# Altium PCB PCB1.PcbDoc
Units mm, origin at the board's own origin, x right, y up, seen from the top; angles counter-clockwise.
Board outline 94 x 98 mm, 2 copper layers (Top Layer, Bottom Layer), stack 1.571 mm thick; 43 components, 34 nets, 209 pads, 286 vias.
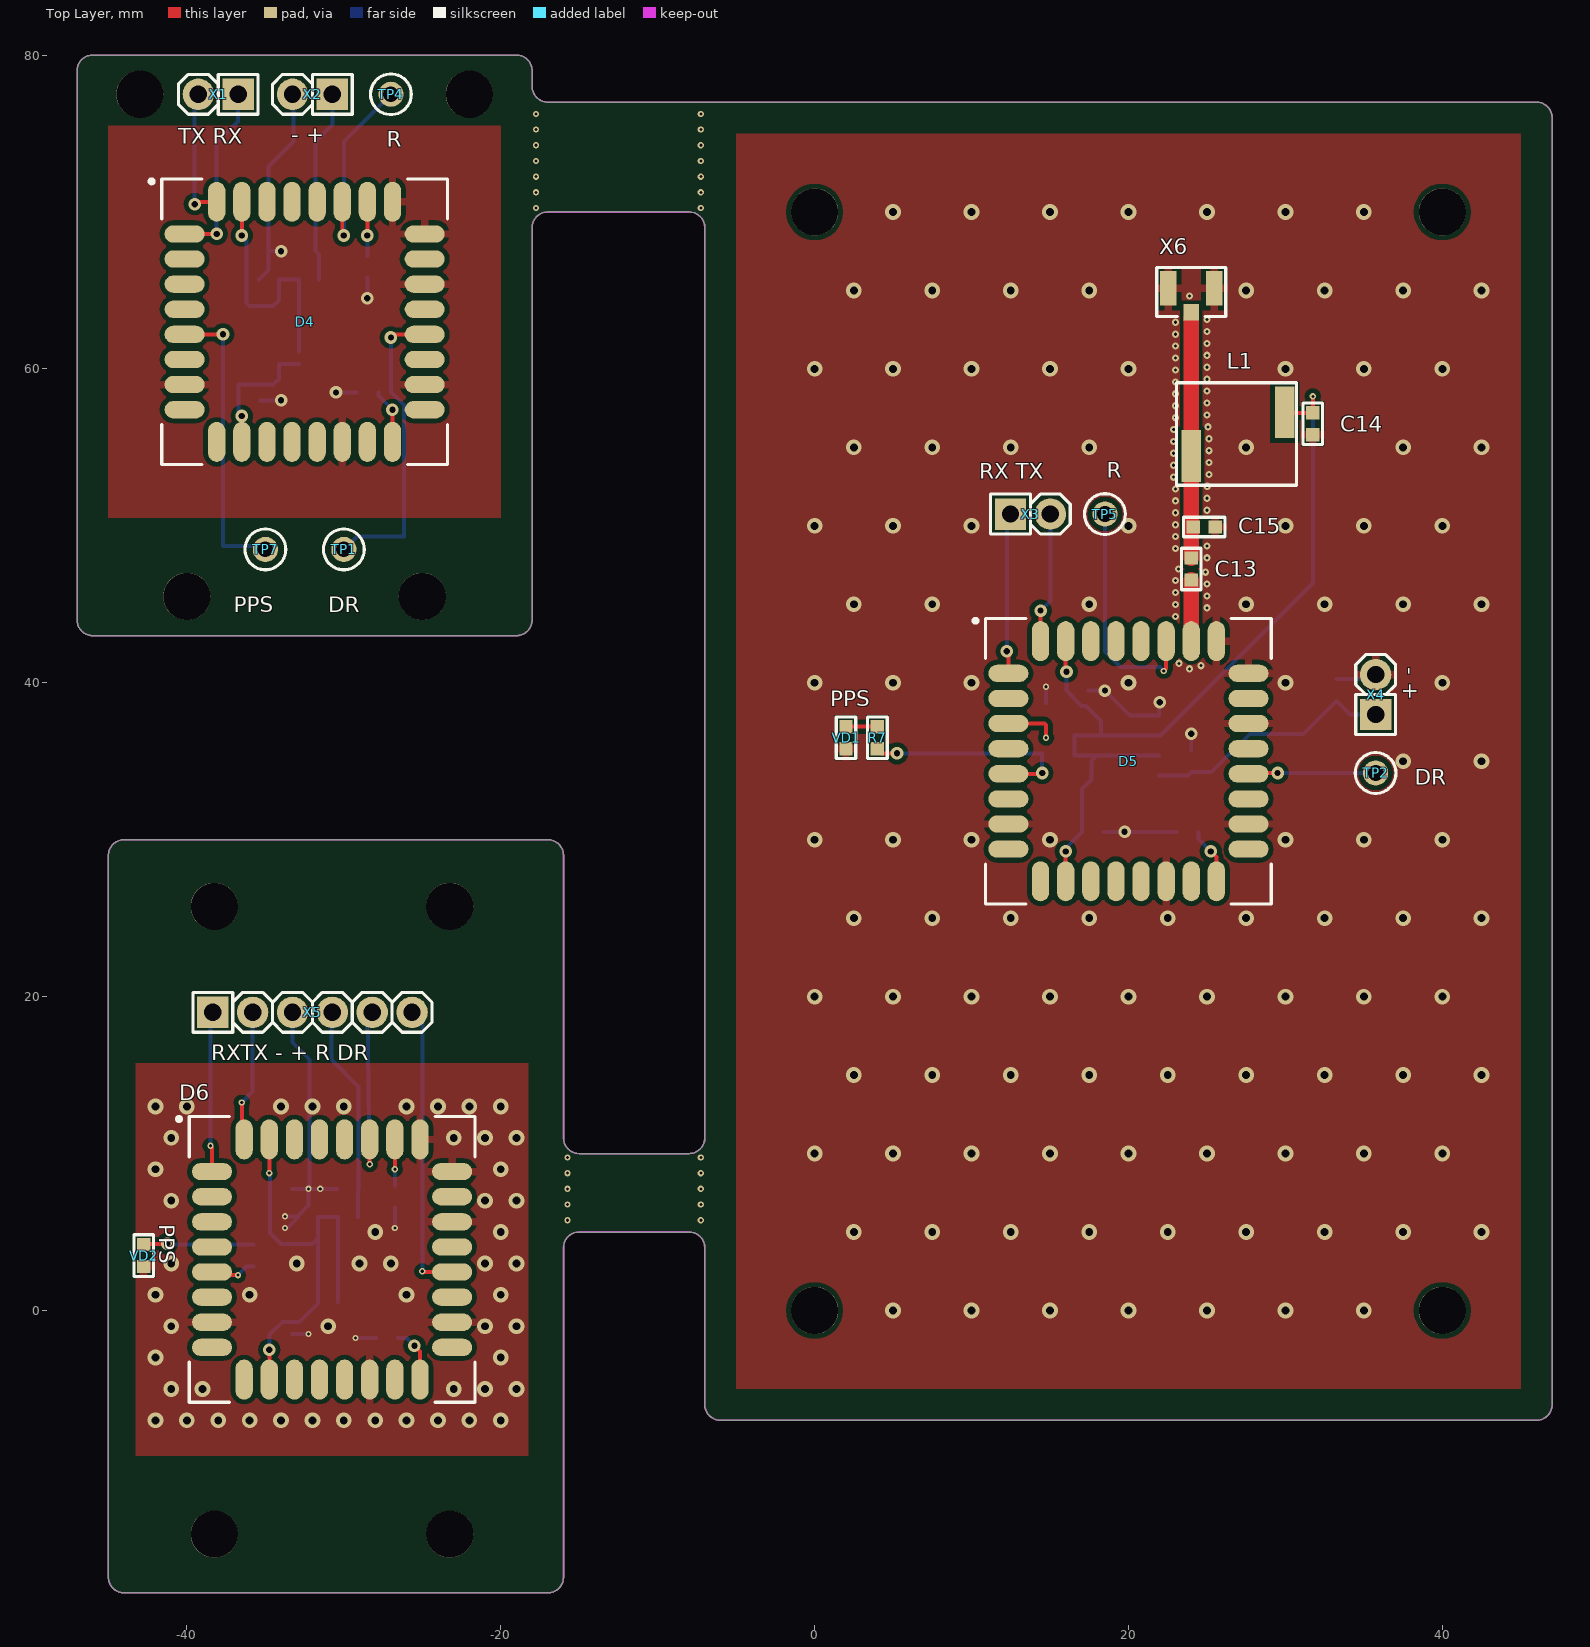
[diagram p0: Top Layer view]
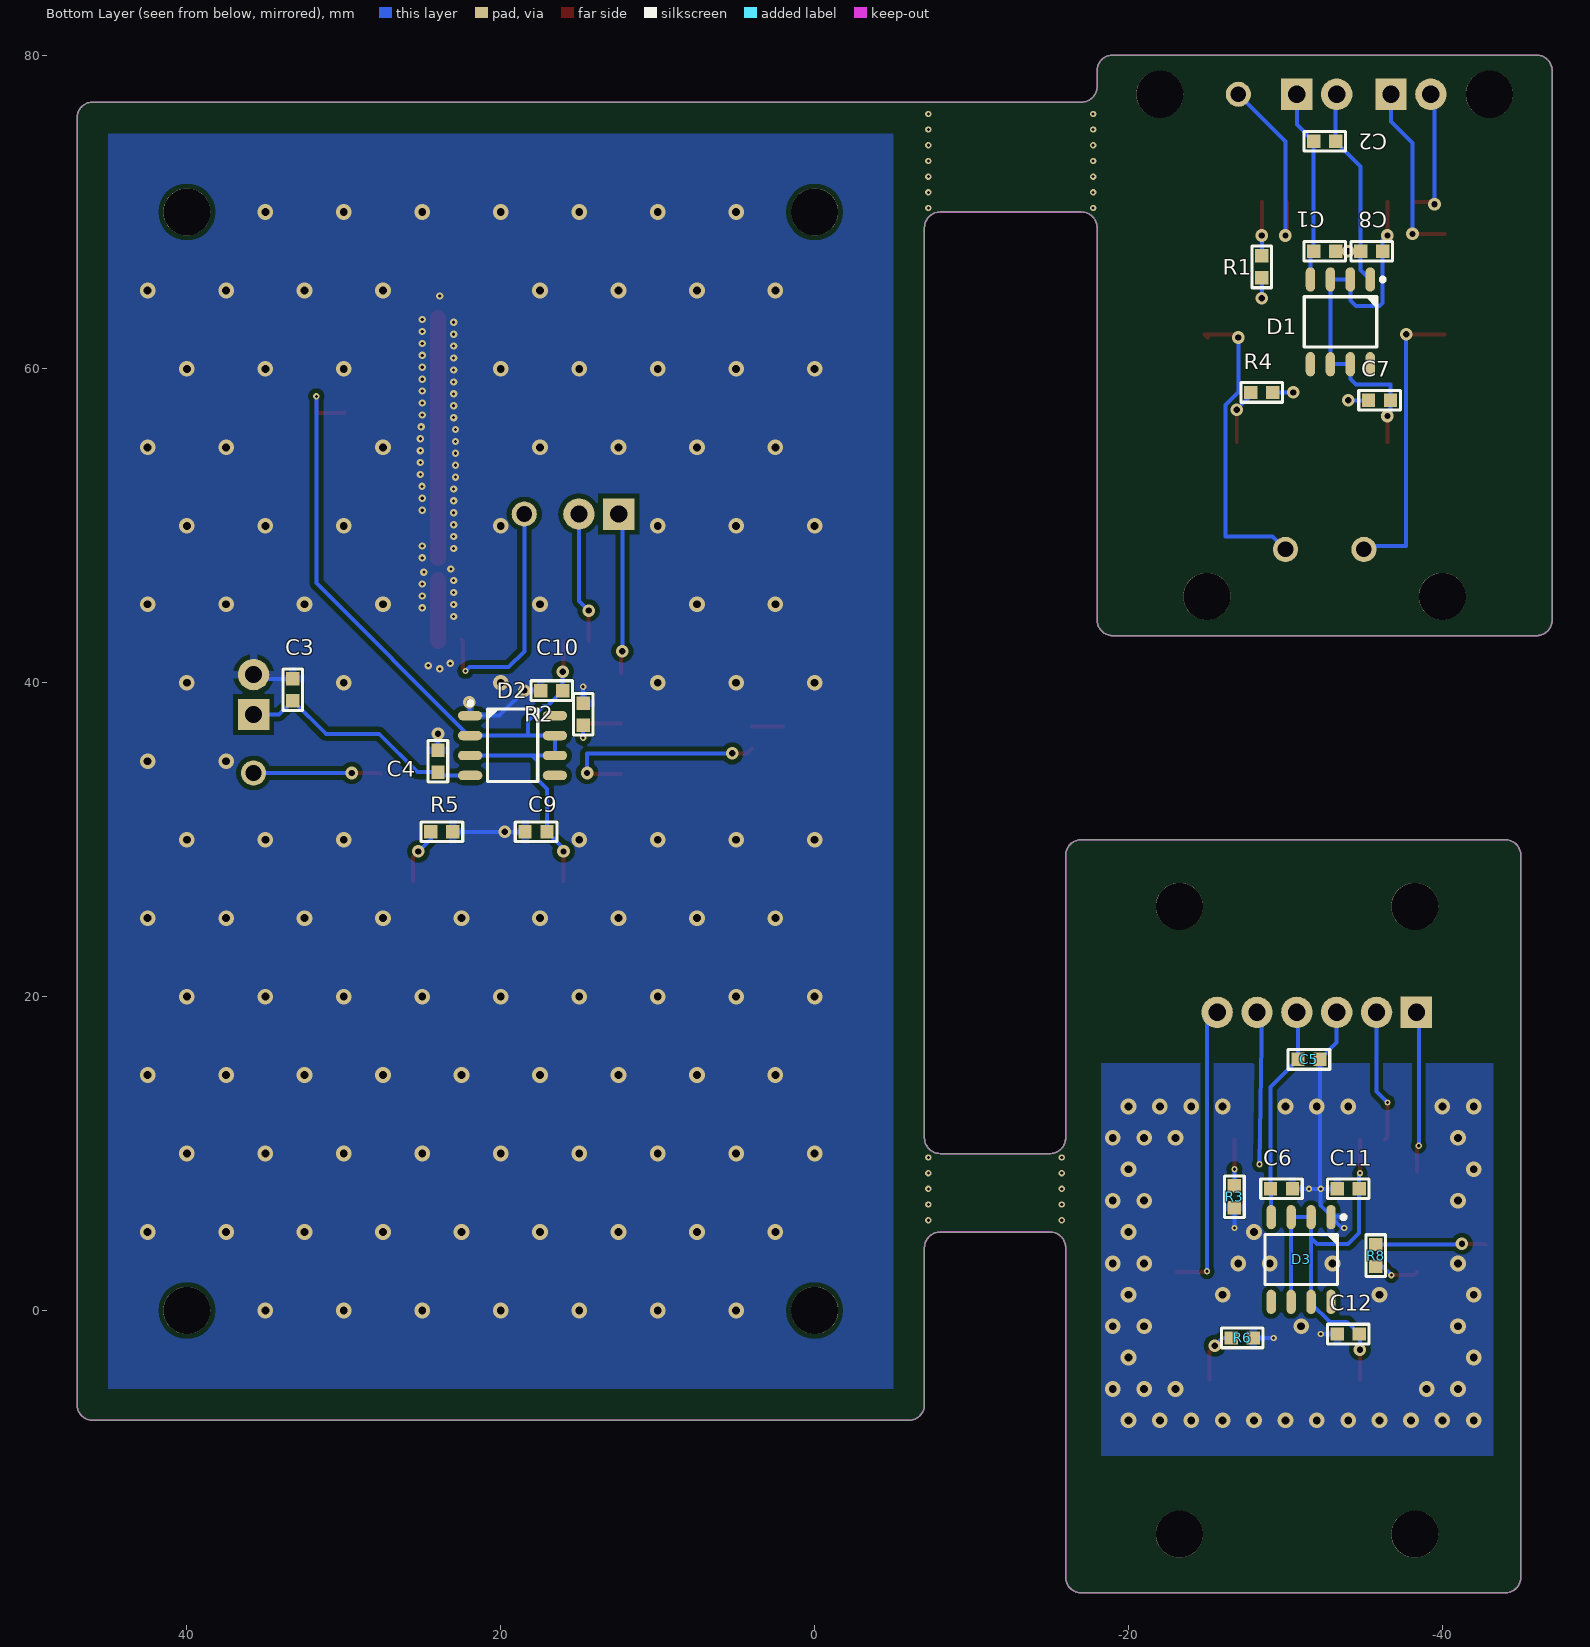
[diagram p1: Bottom Layer view, seen from below]
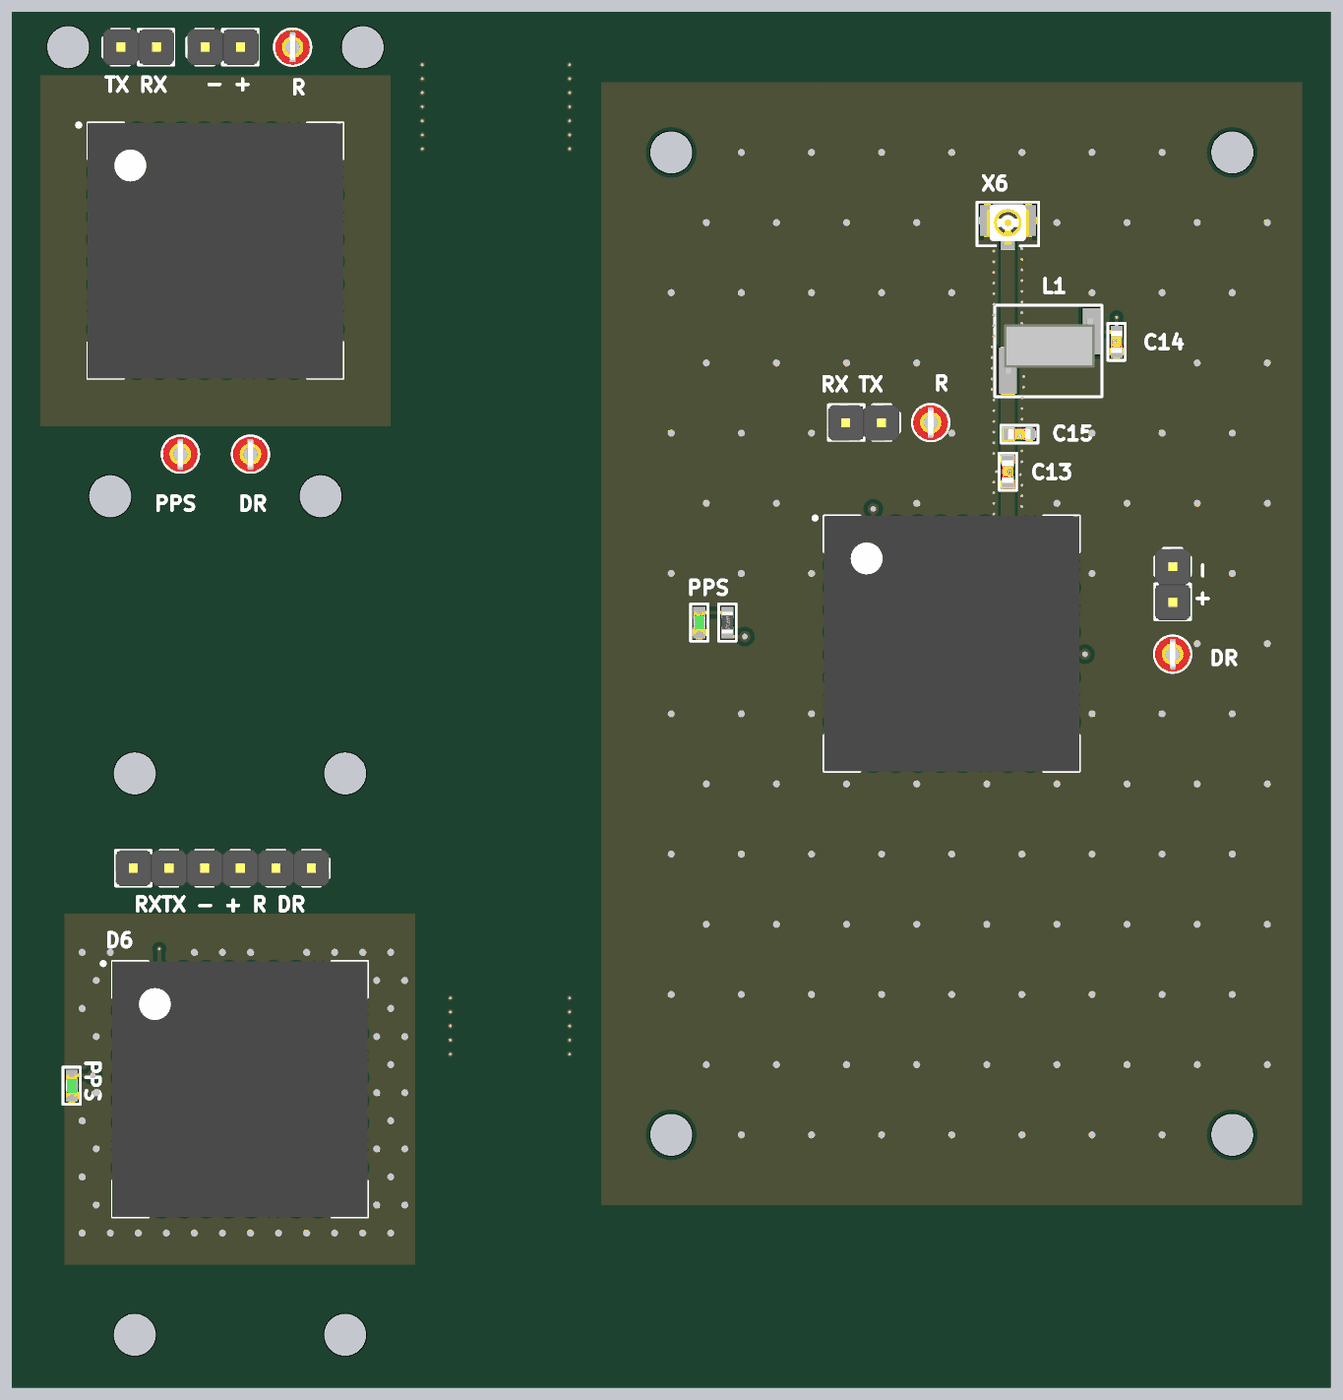
[diagram p2: 3D render of the assembled board from above, using the file's embedded part models]
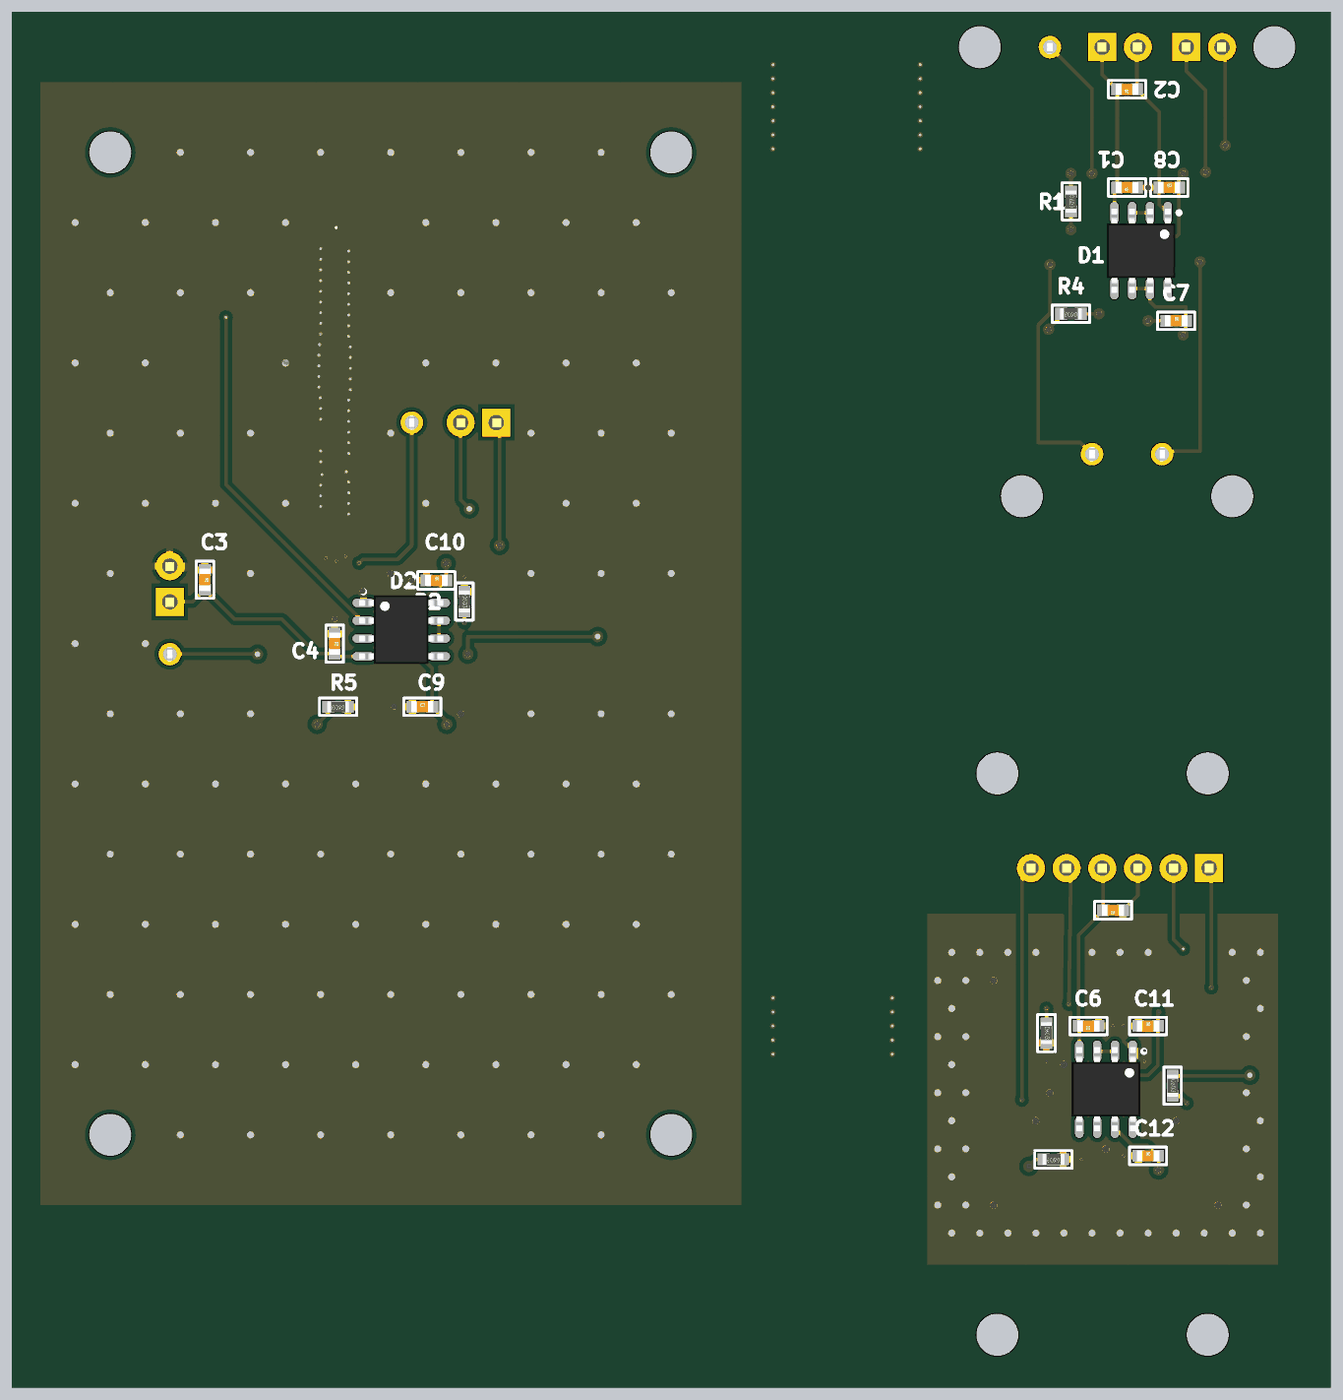
[diagram p3: 3D render of the assembled board from below, using the file's embedded part models]

## Layer stack, top to bottom
Top Solder: solder mask 0.0102, Solder Resist, Dk 3.5
Top Layer: signal copper 0.0356
Dielectric 1: dielectric 1.5, FR-4, Dk 4.8
Bottom Layer: signal copper 0.0356
Bottom Solder: solder mask 0.0102, Solder Resist, Dk 3.5

## Board outline
-45,-17 -45,29 cw(c-44,29) -44,30 -17,30 cw(c-17,29) -16,29 -16,11 ccw(c-15,11) -15,10 -8,10 ccw(c-8,11) -7,11 -7,69 ccw(c-8,69) -8,70 -17,70 ccw(c-17,69) -18,69 -18,44 cw(c-19,44) -19,43 -46,43 cw(c-46,44) -47,44 -47,79 cw(c-46,79) -46,80 -19,80 cw(c-19,79) -18,79 -18,78 ccw(c-17,78) -17,77 46,77 cw(c46,76) 47,76 47,-6 cw(c46,-6) 46,-7 -6,-7 cw(c-6,-6) -7,-6 -7,4 ccw(c-8,4) -8,5 -15,5 ccw(c-15,4) -16,4 -16,-17 cw(c-17,-17) -17,-18 -44,-18 cw(c-44,-17)

## Design rules (kind name [scope] priority, off if disabled: settings)
BoardOutlineClearance [All] p1: gap=0.3 ignorepadtopadclearanceinfootprint=FALSE
Clearance Clearance_1 [InNet('NetC13_1')OR InNet('NetC13_2')] p1: gap=0.2 ignorepadtopadclearanceinfootprint=FALSE
Clearance Clearance_Polygon [InPolygon] p2: gap=0.2 ignorepadtopadclearanceinfootprint=FALSE except(0: Arc-Hole Track-Hole SMDPad-Hole THPad-Hole Via-Hole Fill-Hole Poly-Hole Region-Hole Text-Hole; 0.3: Arc-Poly Arc-Region Track-Poly Track-Region SMDPad-Poly SMDPad-Region THPad-Poly THPad-Region Via-Poly Via-Region Fill-Poly Fill-Region Poly-Poly Poly-Region Region-Region)
Clearance [All] p3: gap=0.2 ignorepadtopadclearanceinfootprint=FALSE except(0: Arc-Hole Track-Hole SMDPad-Hole THPad-Hole Via-Hole Fill-Hole Poly-Hole Region-Hole Text-Hole)
Clearance Clearance_MultiLayerPad [OnLayer('Multi-Layer') and IsPad] p4: gap=0.3 ignorepadtopadclearanceinfootprint=FALSE except(0: Arc-Hole Track-Hole SMDPad-Hole THPad-Hole Via-Hole Fill-Hole Poly-Hole Region-Hole Text-Hole)
ComponentClearance [All] p1: gap=0.5 collisioncheckmode=3 verticalgap=0.5 showdistances=FALSE
DiffPairsRouting [All] p1: maxlimit=0.4 minlimit=0.2 mostfreqgap=0.2 toplayer_minwidth=0.2 toplayer_maxwidth=0.3 toplayer_prefwidth=0.2 bottomlayer_minwidth=0.2 bottomlayer_maxwidth=0.3 bottomlayer_prefwidth=0.2 maxuncoupledlength=12.7
Height [All] p1: minheight=0 maxheight=50 prefheight=12.7
HoleSize [All] p1: absolutevalues=TRUE maxlimit=10 minlimit=0.2 maxpercent=80.000 minpercent=20.000
HoleToHoleClearance [All] p1: gap=0.3 allowstackedmicrovias=TRUE
MinimumSolderMaskSliver [All] p1: minsoldermaskwidth=0.2
PlaneClearance [All] p1: clearance=0.5
PlaneConnect [All] p1: planeconnectstyle=Relief reliefexpansion=0.5 reliefentries=4 reliefconductorwidth=0.5 reliefairgap=0.3
PolygonConnect PolygonConnect_PadGND [InNet('GND') and IsPad] p1: connectstyle=Relief reliefconductorwidth=0.5 reliefentries=4 polygonreliefangle="90 Angle" airgapwidth=0.3
PolygonConnect PolygonConnect_Via [IsVia] p2: connectstyle=Direct reliefconductorwidth=0.254 reliefentries=4 polygonreliefangle="90 Angle" airgapwidth=0.254
PolygonConnect [All] p3: connectstyle=Relief reliefconductorwidth=0.5 reliefentries=4 polygonreliefangle="90 Angle" airgapwidth=0.3
RoutingTopology [All] p1: topology=Vertical
RoutingVias [All] p1: holewidth=0.2 width=0.4 viastyle="Through Hole" minholewidth=0.2 minwidth=0.4 maxholewidth=0.5 maxwidth=1.2
SilkToSolderMaskClearance [IsPad] p1: minsilkscreentomaskgap=0.2 clearancetoexposedcopper=TRUE
SolderMaskExpansion [All] p1: expansion=0.075
Width [All] p1: maxlimit=10 minlimit=0.2 preferedwidth=0.2
20 further rules are at their usual default settings.

## Components (designator, comment, footprint, x,y, rotation, side; value= is the part's Value field where it differs from the comment)
C1 "Ceramic capacitor, 0.1μF, X7R, ±10%, 16V, 0603, -55...+125°C" "CAP: 0603" -32.5,67.5 r0 bottom value=0.1?F
C2 "Ceramic capacitor, 0.1μF, X7R, ±10%, 16V, 0603, -55...+125°C" "CAP: 0603" -32.5,74.5 r0 bottom value=0.1?F
C3 "Ceramic capacitor, 0.1μF, X7R, ±10%, 16V, 0603, -55...+125°C" "CAP: 0603" 33.25,39.55 r270 bottom value=0.1?F
C4 "Ceramic capacitor, 0.1μF, X7R, ±10%, 16V, 0603, -55...+125°C" "CAP: 0603" 24,35 r270 bottom value=0.1?F
C5 "Ceramic capacitor, 0.1μF, X7R, ±10%, 16V, 0603, -55...+125°C" "CAP: 0603" -31.5,16 r0 bottom value=0.1?F
C6 "Ceramic capacitor, 0.1μF, X7R, ±10%, 16V, 0603, -55...+125°C" "CAP: 0603" -29.75,7.75 r0 bottom value=0.1?F
C7 "Ceramic capacitor, 0.1μF, X7R, ±10%, 16V, 0603, -55...+125°C" "CAP: 0603" -36,58 r180 bottom value=0.1?F
C8 "Ceramic capacitor, 0.1μF, X7R, ±10%, 16V, 0603, -55...+125°C" "CAP: 0603" -35.5,67.5 r180 bottom value=0.1?F
C9 "Ceramic capacitor, 0.1μF, X7R, ±10%, 16V, 0603, -55...+125°C" "CAP: 0603" 17.75,30.5 r180 bottom value=0.1?F
C10 "Ceramic capacitor, 0.1μF, X7R, ±10%, 16V, 0603, -55...+125°C" "CAP: 0603" 16.75,39.5 r180 bottom value=0.1?F
C11 "Ceramic capacitor, 0.1μF, X7R, ±10%, 16V, 0603, -55...+125°C" "CAP: 0603" -34,7.75 r180 bottom value=0.1?F
C12 "Ceramic capacitor, 0.1μF, X7R, ±10%, 16V, 0603, -55...+125°C" "CAP: 0603" -34,-1.5 r180 bottom value=0.1?F
C13 "Ceramic capacitor, 100Пф, NP0, ±10%, 16V, 0603, -55...+125°C" "CAP: 0603" 24,47.25 r270 top value=100Пф
C14 "Ceramic capacitor, 100 пФ, NP0, ±10%, 16V, 0603, -55...+125°C" "CAP: 0603" 31.75,56.5 r90 top value="100 пФ"
C15 "Ceramic capacitor, 2.2 пФ, NP0, ±10%, 16V, 0603, -55...+125°C" "CAP: 0603" 24.825,49.925 r180 top value="2.2 пФ"
D1 "LD1117D33TR" 8-SOIC -33.5,63 r270 bottom
D2 "LD1117D33TR" 8-SOIC 19.25,36 r180 bottom
D3 "LD1117D33TR" 8-SOIC -31,3.25 r270 bottom
D4 "SE878K3-A" "MOD: SE878K3-A" -32.5,63 r0 top
D5 "SE878K3-A" "MOD: SE878K3-A" 20,35 r0 top
D6 "SE878K3-A" "MOD: SE878K3-A" -30.75,3.25 r0 top
L1 "B09TJL" "IND: BxxT" 29.96,57.24 r180 top value="35 нГн"
R1 "Resistor film, 1k, ±5%, 0603, 0.1W, -55...+125°C" "RES: 0603" -28.5,66.5 r270 bottom value=1k
R2 "Resistor film, 1k, ±5%, 0603, 0.1W, -55...+125°C" "RES: 0603" 14.75,38 r270 bottom value=1k
R3 "Resistor film, 1k, ±5%, 0603, 0.1W, -55...+125°C" "RES: 0603" -26.75,7.25 r270 bottom value=1k
R4 "Resistor film, 1k, ±5%, 0603, 0.1W, -55...+125°C" "RES: 0603" -28.5,58.5 r0 bottom value=1k
R5 "Resistor film, 1k, ±5%, 0603, 0.1W, -55...+125°C" "RES: 0603" 23.75,30.5 r0 bottom value=1k
R6 "Resistor film, 1k, ±5%, 0603, 0.1W, -55...+125°C" "RES: 0603" -27.25,-1.75 r0 bottom value=1k
R7 "Resistor film, 1k, ±5%, 0603, 0.1W, -55...+125°C" "RES: 0603" 4,36.5 r270 top value=1k
R8 "Resistor film, 1k, ±5%, 0603, 0.1W, -55...+125°C" "RES: 0603" -35.75,3.5 r270 bottom value=1k
TP1 "Test point, Keystone, 5001" "CON: 5000 (Keystone)" -30,48.5 r0 top
TP2 "Test point, Keystone, 5001" "CON: 5000 (Keystone)" 35.75,34.25 r0 top
TP4 "Test point, Keystone, 5001" "CON: 5000 (Keystone)" -27,77.5 r0 top
TP5 "Test point, Keystone, 5001" "CON: 5000 (Keystone)" 18.5,50.75 r0 top
TP7 "Test point, Keystone, 5001" "CON: 5000 (Keystone)" -35,48.5 r0 top
VD1 "LED, Green, *, *, *, -55...+150°C" "LED: 0603G" 2,36.5 r270 top
VD2 "LED, Green, *, *, *, -55...+150°C" "LED: 0603G" -42.75,3.5 r270 top
X1 "Connector, 2pin, 2.54mm, 500VAC, 3A" "CON: PLS-2" -38,77.5 r180 top
X2 "Connector, 2pin, 2.54mm, 500VAC, 3A" "CON: PLS-2" -32,77.5 r180 top
X3 "Connector, 2pin, 2.54mm, 500VAC, 3A" "CON: PLS-2" 13.75,50.75 r0 top
X4 "Connector, 2pin, 2.54mm, 500VAC, 3A" "CON: PLS-2" 35.75,39.25 r90 top
X5 "Connector, 6pin, 2.54mm, 500VAC, 3A" "CON: PLS-6" -32,19 r0 top
X6 "Connector u.FL, 50 Ohm, 6GHz" "CON: u.Fl" 24,65.15 r0 top

## Footprints (in the part's own frame and the unit in brackets; to place one, negate y for a bottom-side part, rotate by r counter-clockwise, add the part's x,y. Pads: shape width x height; smd on the part's side, far side on the other; paste and mask are expansions set on the pad)
8-SOIC [mm] "pitch 1.27 mm"
  rrect100% 1.55x0.6 smd: 1(-2.7,1.905) 2(-2.7,0.635) 3(-2.7,-0.635) 4(-2.7,-1.905) 5(2.7,-1.905) 6(2.7,-0.635) 7(2.7,0.635) 8(2.7,1.905)
  round 0.7 on Mech1: 28(-2.395,1.8)
  silkscreen extent -2.82,-2.3 1.61,2.82, body extent -3,-2.45 3,2.45, height 1.75
"CAP: 0603" [mm]
  rect 0.85x0.85 smd: 1(-0.7,0) 2(0.7,0)
  silkscreen extent -1.33,-0.63 1.33,0.63, body extent -0.8,-0.4 0.8,0.4, height 0.3
"CON: 5000 (Keystone)" [mm]
  round 1.6 hole 1: 1(0,0)
  silkscreen extent -1.3,-1.3 1.3,1.3, body extent -1.27,-1.27 1.27,1.27, height 4.94
"CON: PLS-2" [mm]
  rect 2x2 hole 1.1: 1(-1.27,0)
  round 2 hole 1.1: 2(1.27,0)
  silkscreen extent -2.54,-1.27 2.54,1.27, body extent -2.57,-1.28 2.51,1.26, height 8.54
"CON: PLS-6" [mm]
  rect 2x2 hole 1.1: 1(-6.35,0)
  round 2 hole 1.1: 2(-3.81,0) 3(-1.27,0) 4(1.27,0) 5(3.81,0) 6(6.35,0)
  silkscreen extent -7.62,-1.27 7.62,1.27, body extent -7.62,-1.27 7.62,1.27, height 8.54
"CON: u.Fl" [mm]
  rect 1x1.05 smd: 1(0,-1.525)
  rect 1.05x2.2 smd: 2(-1.475,0) 2(1.475,0)
  silkscreen extent -2.2,-1.81 2.2,1.31, body extent -1.5,-1.71 1.5,1.14, height 1.27
"IND: BxxT" [mm] "Mini Air Core Inductor"
  rect 1.27x3.3 smd: 1(0,0) 2(5.96,2.79)
  silkscreen extent -0.75,-1.88 6.9,4.65, body extent -0.23,-0.94 6.23,3, height 2.9
"LED: 0603G" [mm]
  rect 0.85x0.85 smd: 1(-0.7,0) 2(0.7,0)
  silkscreen extent -1.33,-0.63 1.33,0.63, body extent -0.8,-0.4 0.8,0.4, height 0.6
"MOD: SE878K3-A" [mm] "PQFN, 32-Leads, Body 18.00x18.00mm, Pitch 1.60mm, IPC Medium Density"
  oval 2.55x1.1 smd: 1(-7.65,5.6) 2(-7.65,4) 3(-7.65,2.4) 4(-7.65,0.8) 5(-7.65,-0.8) 6(-7.65,-2.4) 7(-7.65,-4) 8(-7.65,-5.6) 17(7.65,-5.6) 18(7.65,-4) 19(7.65,-2.4) 20(7.65,-0.8) 21(7.65,0.8) 22(7.65,2.4) 23(7.65,4) 24(7.65,5.6)
  oval 1.1x2.55 smd: 9(-5.6,-7.65) 10(-4,-7.65) 11(-2.4,-7.65) 12(-0.8,-7.65) 13(0.8,-7.65) 14(2.4,-7.65) 15(4,-7.65) 16(5.6,-7.65) 25(5.6,7.65) 26(4,7.65) 27(2.4,7.65) 28(0.8,7.65) 29(-0.8,7.65) 30(-2.4,7.65) 31(-4,7.65) 32(-5.6,7.65)
  silkscreen extent -9.87,-9.1 9.1,9.1, body extent -9.1,-9.1 9.1,9.1, height 6.35
"RES: 0603" [mm]
  rect 0.85x0.85 smd: 1(-0.7,0) 2(0.7,0)
  silkscreen extent -1.33,-0.63 1.33,0.63, body extent -0.8,-0.4 0.8,0.4, height 0.44

## Part data
C1 C2 C3 C4 C5 C6 C7 C8 C9 C10 C11 C12: library part Ceramic_0603, Manufacturer=Yageo, Package=0603, PartNumber=CC0603KRX7R7BB104, Temperature=-55...+125°C, Tolerance=±10%, TypeCapacitor="Ceramic capacitor", TypeDielectric=X7R, ValueManufacturerPartNumber="Ceramic capacitor, 0.1?F, X7R, ±10%, 16V, 0603, -55...+125°C", Voltage=16V, HelpURL=https://www.digikey.com/product-detail/en/yageo/CC0603KRX7R7BB104/311-1088-1-ND/302998
C13 C14 C15: library part Ceramic_0603, Manufacturer=Yageo, Package=0603, PartNumber=CC0603KRX7R7BB104, Temperature=-55...+125°C, Tolerance=±10%, TypeCapacitor="Ceramic capacitor", TypeDielectric=NP0, Voltage=16V, HelpURL=https://www.digikey.com/product-detail/en/yageo/CC0603KRX7R7BB104/311-1088-1-ND/302998
  C13: ValueManufacturerPartNumber="Ceramic capacitor, 100Пф, NP0, ±10%, 16V, 0603, -55...+125°C"
  C14: ValueManufacturerPartNumber="Ceramic capacitor, 100 пФ, NP0, ±10%, 16V, 0603, -55...+125°C"
  C15: ValueManufacturerPartNumber="Ceramic capacitor, 2.2 пФ, NP0, ±10%, 16V, 0603, -55...+125°C"
D1 D2 D3: "Linear voltage regulator", Manufacturer="ST MICROELECTRONICS", Package=SOIC-8, HelpURL=https://eu.mouser.com/datasheet/2/389/ld1117-1849389.pdf, PartNumber=LD1117D33TR
D4 D5 D6: "Smart Antenna GNSS Receiver Module", Manufacturer=TELIT, Package=QFN-32, ValueManufacturerPartNumber="SE878K3-A TELIT", HelpURL=https://www.telit.com/m2m-iot-products/positioning-timing-modules/smart-antenna-gnss-se878k3-a/, Model=SE878K3-A
L1: library part Inductor_air, "Mini Air Core Inductor", Manufacturer=COILCRAFT, Tolerance=+-5%, HelpURL=https://www.mouser.pl/ProductDetail/Coilcraft/B09TJLC?qs=zCSbvcPd3pYV%2FA6WdXVVuw%3D%3D, Model=B09TJL
R1 R2 R3 R4 R5 R6 R7 R8: library part Resistor_0603, Manufacturer=Yageo, Package=0603, PartNumber=RC0603JR-07100RL, Power=0.1W, Temperature=-55...+125°C, Tolerance=±5%, TypeResistor="Resistor film", HelpURL=https://www.digikey.com/product-detail/en/yageo/RC0603JR-07100RL/311-100GRCT-ND/729644, ValueManufacturerPartNumber="Resistor film, 1k, ±5%, 0603, 0.1W, -55...+125°C"
TP1 TP2 TP4 TP5 TP7: library part Connector_Test_Point, Manufacturer=Keystone, PartNumber=5001, HelpURL=https://www.digikey.com/product-detail/en/keystone-electronics/5001/36-5001-ND/255327, TypeConnector="Test point", ValueManufacturerPartNumber="Test point, Keystone, 5001"
VD1 VD2: library part LED_single, Color=GREEN, ColorParameter=Green, Temperature=-55...+150°C, TypeDiode=LED, ValueManufacturerPartNumber="LED, Green, *, *, *, -55...+150°C"
X1 X2 X3 X4: library part PLS-2, CurrentMax=3A, Manufacturer=Connfly, VoltageMax=500VAC, CommentText="\"Разъем\"", HelpURL=https://www.chipdip.ru/product/pls-2, Multichannel=2pin, PartNumber=PLS-2, Pitch=2.54mm, TypeConnector=Connector, ValueManufacturerPartNumber="Connector, 2pin, 2.54mm, 500VAC, 3A"
X5: library part PLS-6, CurrentMax=3A, Manufacturer=Connfly, VoltageMax=500VAC, CommentText="\"Разъем\"", HelpURL=https://www.chipdip.ru/product/pls-6, Multichannel=6pin, PartNumber=PLS-6, Pitch=2.54mm, TypeConnector=Connector, ValueManufacturerPartNumber="Connector, 6pin, 2.54mm, 500VAC, 3A"
X6: library part Connector_uFL, Frequency=6GHz, Manufacturer="Hirose Electric", PartNumber=U.FL-R-SMT(01), CommentText="\"Разъем\"", HelpURL=https://www.digikey.com/product-detail/en/hirose-electric-co-ltd/U.FL-R-SMT-01/H9161-ND/513010, Impedance="50 Ohm", TypeConnector="Connector u.FL", ValueManufacturerPartNumber="Connector u.FL, 50 Ohm, 6GHz"

## Free pads (board coordinates)
  round 3 hole 3 unplated: 8(-43,77.5) 8(-40,45.5) 8(-38.25,-14.25) 8(-38.25,25.75) 8(-25,45.5) 8(-23.25,-14.25) 8(-23.25,25.75) 8(-22,77.5) 8(0,0) 8(0,70) 8(40,0) 8(40,70)

## Via types
v1: diameter 1, hole 0.5, Top Layer to Bottom Layer, tented both sides, 164 vias
v2: diameter 0.46, hole 0.2, Top Layer to Bottom Layer, tented both sides, 52 vias
v3: diameter 0.4, hole 0.2, Top Layer to Bottom Layer, tented both sides, 42 vias
v4: diameter 0.8, hole 0.4, Top Layer to Bottom Layer, tented both sides, 28 vias

## Nets (pads, with @x,y where several pads share a name; then routed paths per layer and width w, separated by ;. In a path a pad name is that pad's centre, name@x,y a point inside that pad or via, vN(x,y) a via of type N, cw(c..) or ccw(c..) an arc to the next point about the centre after c; other vN are vias at no path point)
1_33V: C7.2 C8.2 D1.2 D1.3 D1.6 D1.7 D4.10 D4.31 | length 24.7
  Top Layer w0.254: D4.10 v4(-36.5,57) ; v4(-36.5,68.5) D4.31
  Bottom Layer w0.254: v4(-36.5,57) -36.7,57.2 C7.2 -36.7,59 -34.5,59 -34.135,59.365 D1.7 D1.6 ; v4(-36.5,68.5) -36.2,68.2 C8.2 -36.2,64.2 -36,64 -34.5,64 -34.135,64.365 D1.2 D1.3 -32.865,61.102
1_GND: C1.1 C2.1 C7.1 C8.1 D1.1 D4.7 D4.14 D4.18 D4.22 D4.24 D4.25 R1.2 R4.1 X2.2 | length 17.4
  Bottom Layer w0.254: D1.1 -34.8,66.305 C8.1 ; C7.1 v4(-34,58) ; v4(-34,67.5) C8.1 ; X2.2 -33.2,77.43 C2.1 -34.8,72.9 C8.1 ; v4(-30.5,58.5) R4.1 ; v4(-28.5,64.5) R1.2
1_RX: D4.1 X1.1 | length 11.5
  Top Layer w0.254: D4.1 v4(-38.1,68.6)
  Bottom Layer w0.254: v4(-38.1,68.6) -38.1,74.4 -36.73,75.77 X1.1
1_TX: D4.32 X1.2 | length 8.6
  Top Layer w0.254: v4(-39.5,70.5) -39.35,70.65 D4.32
  Bottom Layer w0.254: v4(-39.5,70.5) -39.5,77.27 X1.2
1_VIN: C1.2 C2.2 D1.4 X2.1 | length 12.3
  Bottom Layer w0.254: D1.4 -31.595,67.295 C1.2 C2.2 -30.73,75.57 X2.1
2_33V: C9.2 C10.2 C14.2 D2.2 D2.3 D2.6 D2.7 D5.10 D5.31 L1.1 | length 56.6
  Top Layer w0.254: D5.10 v4(16,29.25) ; D5.31 16,40.75 v4(16.05,40.7) ; L1.1 30,57.2 C14.2 v3(31.75,58.25)
  Bottom Layer w0.254: v4(16,29.25) 16,29.45 C9.2 17.05,33.233 17.652,33.835 17.652,35.017 18,35.365 ; v4(16.05,40.7) C10.2 17.018,38.532 17.285,38.532 18.25,37.567 18.25,36.635 ; D2.3 18,35.365 ; v3(31.75,58.25) 31.75,46.343 22.042,36.635 D2.2 18.25,36.635 ; 18,35.365 D2.6 D2.7 18.25,36.635
2_GND: C3.1 C4.1 C9.1 C10.1 C14.1 C15.1 D2.1 D5.7 D5.14 D5.18 D5.22 D5.24 D5.25 R2.1 R5.1 VD1.2 X4.2 X6.2 | length 15.3
  Bottom Layer w0.254: R2.1 v3(14.75,39.75) ; C10.1 v4(18.5,39.5) 20.095,37.905 D2.1 21.95,38.7 v4(22,38.75) ; C9.1 v4(19.75,30.5) R5.1 ; C4.1 v4(24,36.75) ; C3.1 35.48,40.25 X4.2
  other v1: 5,0 10,0 15,0 20,0 25,0 30,0 35,0 2.5,5 7.5,5 12.5,5 17.5,5 22.5,5 27.5,5 32.5,5 37.5,5 42.5,5 0,10 5,10 10,10 15,10 20,10 25,10 30,10 35,10 40,10 2.5,15 7.5,15 12.5,15 17.5,15 22.5,15 27.5,15 32.5,15 37.5,15 42.5,15 0,20 5,20 10,20 15,20 20,20 25,20 30,20 35,20 40,20 2.5,25 7.5,25 12.5,25 17.5,25 22.5,25 27.5,25 32.5,25 37.5,25 42.5,25 0,30 5,30 10,30 15,30 30,30 35,30 40,30 37.5,35 42.5,35 0,40 5,40 10,40 20,40 30,40 40,40 2.5,45 7.5,45 17.5,45 27.5,45 32.5,45 37.5,45 42.5,45 0,50 5,50 10,50 20,50 30,50 35,50 40,50 2.5,55 7.5,55 12.5,55 17.5,55 27.5,55 37.5,55 42.5,55 0,60 5,60 10,60 15,60 20,60 30,60 35,60 40,60 2.5,65 7.5,65 12.5,65 17.5,65 27.5,65 32.5,65 37.5,65 42.5,65 5,70 10,70 15,70 20,70 25,70 30,70 35,70
  other v2: 23.889,40.887 24.621,41.09 23.215,41.238 23.001,44.23 24.999,44.774 23.001,44.99 24.999,45.534 23.001,45.75 24.999,46.294 23.001,46.51 24.9,47.047 23.18,47.248 24.999,47.959 23.001,48.551 24.999,48.719 23.001,49.311 23.001,50.071 23.001,50.831 24.999,50.997 23.001,51.591 24.999,51.757 23.001,52.351 25.023,52.517 22.876,53.101 25.124,53.27 22.876,53.861 25.124,54.03 22.876,54.621 25.124,54.79 22.876,55.381 25.124,55.55 22.884,56.141 25.073,56.308 23.001,56.892 24.999,57.065 23.001,57.652 24.999,57.825 23.001,58.412 24.999,58.585 23.001,59.172 24.999,59.345 23.001,59.932 24.999,60.105 23.001,60.692 24.999,60.865 23.001,61.452 24.999,61.625 23.001,62.212 24.999,62.385 23.001,62.972 24.999,63.145 23.886,64.639
2_RX: D5.1 X3.1 | length 10.3
  Top Layer w0.254: v4(12.25,42) 12.35,41.9 D5.1
  Bottom Layer w0.254: v4(12.25,42) 12.25,50.52 X3.1
2_TX: D5.32 X3.2 | length 8.4
  Top Layer w0.254: D5.32 v4(14.4,44.6)
  Bottom Layer w0.254: v4(14.4,44.6) 15.02,45.22 X3.2
2_VIN: C3.2 C4.2 D2.4 X4.1 | length 16.1
  Bottom Layer w0.254: D2.4 23.795,34.095 C4.2 25.3,34.3 27.75,36.75 31.15,36.75 C3.2 34.12,37.98 X4.1
3_33V: C11.2 C12.2 D3.2 D3.3 D3.6 D3.7 D6.10 D6.31 | length 28.4
  Top Layer w0.254: D6.10 v4(-34.75,-2.5) ; v3(-34.75,8.75) D6.31
  Bottom Layer w0.254: v4(-34.75,-2.5) -34.75,-1.55 C12.2 -33.95,-0.75 -33.862,-0.75 -33.86,-0.748 -32.841,-0.748 -31.635,0.458 D3.7 -31.635,4.615 ; v3(-34.75,8.75) -34.7,8.7 C11.2 -34.7,4.95 -34,4.25 -32,4.25 -31.635,4.615 ; D3.6 D3.3 D3.2 -31.635,4.615
3_GND: C5.1 C6.1 C11.1 C12.1 D3.1 D6.7 D6.14 D6.18 D6.22 D6.24 D6.25 R3.2 R6.1 VD2.2 X5.3 | length 22.3
  Bottom Layer w0.254: v3(-33.75,5.25) -33.605,5.25 D3.1 D3.1@-32.955,6 ; v3(-33.75,6) D3.1@-32.955,6 ; C12.1 v3(-32.25,-1.5) ; C11.1 v3(-32.25,7.75) ; X5.3 -33.27,17.07 C5.1 -32.2,7.8 v3(-32.25,7.75) ; C6.1 v3(-31.5,7.75) v3(-32.25,7.75) ; v3(-29.25,-1.75) R6.1 ; v3(-26.75,5.25) R3.2 ; D3.1@-32.955,6 -32.25,6.705 v3(-32.25,7.75)
  other v1: -42,-7 -40,-7 -38,-7 -36,-7 -34,-7 -32,-7 -30,-7 -28,-7 -26,-7 -24,-7 -22,-7 -20,-7 -41,-5 -39,-5 -23,-5 -21,-5 -19,-5 -42,-3 -20,-3 -41,-1 -31,-1 -21,-1 -19,-1 -42,1 -36,1 -26,1 -20,1 -41,3 -33,3 -29,3 -27,3 -21,3 -19,3 -28,5 -20,5 -41,7 -21,7 -19,7 -42,9 -20,9 -41,11 -23,11 -21,11 -19,11 -42,13 -40,13 -34,13 -32,13 -30,13 -26,13 -24,13 -22,13 -20,13
3_RX: D6.32 X5.2 | length 8.4
  Top Layer w0.254: v3(-36.5,13.25) -36.5,11.05 D6.32
  Bottom Layer w0.254: v3(-36.5,13.25) -35.81,13.94 X5.2
3_TX: D6.1 X5.1 | length 10.3
  Top Layer w0.254: v3(-38.5,10.5) -38.4,10.4 D6.1
  Bottom Layer w0.254: v3(-38.5,10.5) -38.5,18.85 X5.1
3_VIN: C5.2 C6.2 D3.4 X5.4 | length 13.8
  Bottom Layer w0.254: X5.4 -30.8,18.93 C5.2 -29.05,14.25 C6.2 -29.095,7.705 D3.4
DR: D6.20 X5.6 | length 18.7
  Top Layer w0.254: v3(-25,2.5) -24.95,2.45 D6.20
  Bottom Layer w0.254: X5.6 -25,18.35 v3(-25,2.5)
NetC13_1: C13.1 C15.2 L1.2 X6.1 | length 15.3
  Top Layer w1: C13.1 L1.2 X6.1@24,63.25
NetC13_2: C13.2 D5.26 | length 3.9
  Top Layer w1: D5.26 C13.2
NetD4_5: D4.5 TP7.1 | length 18.7
  Top Layer w0.254: D4.5 v4(-37.7,62.2)
  Bottom Layer w0.254: v4(-37.7,62.2) -37.7,48.7 -35.2,48.7 TP7.1
NetD4_16: D4.16 R4.2 | length 3.5
  Top Layer w0.254: D4.16 v4(-26.9,57.4)
  Bottom Layer w0.254: R4.2 -27.8,58.3 v4(-26.9,57.4)
NetD4_20: D4.20 TP1.1 | length 19.7
  Top Layer w0.254: v4(-27,62) -26.8,62.2 D4.20 D4.20@-25.05,62
  Bottom Layer w0.254: TP1.1 -29.173,49.327 -26.173,49.327 -26.173,57.701 -27,58.528 v4(-27,62)
NetD4_26: D4.26 R1.1 | length 3.5
  Top Layer w0.254: v4(-28.5,68.5) D4.26
  Bottom Layer w0.254: R1.1 v4(-28.5,68.5)
NetD4_27: D4.27 TP4.1 | length 12.4
  Top Layer w0.254: D4.27 -30.1,68.6 v4(-30,68.5)
  Bottom Layer w0.254: v4(-30,68.5) -30,74.5 TP4.1
NetD5_3: D5.3 R2.2 | length 4
  Top Layer w0.254: D5.3 14.65,37.4 14.75,37.3 v3(14.75,36.5)
  Bottom Layer w0.254: v3(14.75,36.5) R2.2
NetD5_5: D5.5 R7.2 | length 14
  Top Layer w0.254: R7.2 4.3,35.5 v4(5.25,35.5) ; D5.5 14.45,34.2 v4(14.5,34.25)
  Bottom Layer w0.254: v4(5.25,35.5) 14.5,35.5 v4(14.5,34.25)
NetD5_16: D5.16 R5.2 | length 3.6
  Top Layer w0.254: v4(25.25,29.25) 25.6,28.9 D5.16
  Bottom Layer w0.254: R5.2 24.45,30.05 v4(25.25,29.25)
NetD5_20: D5.20 TP2.1 | length 8.1
  Top Layer w0.254: D5.20 27.7,34.25 v4(29.5,34.25)
  Bottom Layer w0.254: v4(29.5,34.25) TP2.1
NetD5_27: D5.27 TP5.1 | length 15.1
  Top Layer w0.254: v3(22.25,40.75) 22.4,40.9 D5.27 D5.27@22.5,42.75
  Bottom Layer w0.254: TP5.1 18.5,42 19.5,41 22,41 v3(22.25,40.75)
NetD6_5: D6.5 R8.2 | length 3
  Top Layer w0.254: D6.5 -38.2,2.25 v3(-36.75,2.25)
  Bottom Layer w0.254: v3(-36.75,2.25) -36.2,2.8 R8.2
NetD6_16: D6.16 R6.2 | length 3.6
  Top Layer w0.254: v4(-25.5,-2.25) -25.15,-2.6 D6.16
  Bottom Layer w0.254: R6.2 -26,-1.75 v4(-25.5,-2.25)
NetD6_26: D6.26 R3.1 | length 2.9
  Top Layer w0.254: v3(-26.75,9) D6.26
  Bottom Layer w0.254: R3.1 v3(-26.75,9)
NetR7_1: R7.1 VD1.1 | length 2
  Top Layer w0.254: VD1.1 R7.1
NetR8_1: R8.1 VD2.1 | length 7
  Top Layer w0.254: VD2.1 -42.7,4.25 v4(-41.25,4.25)
  Bottom Layer w0.254: v4(-41.25,4.25) -41.2,4.2 R8.1
R: D6.27 X5.5 | length 11.3
  Top Layer w0.254: v3(-28.35,9.318) D6.27
  Bottom Layer w0.254: X5.5@-28.5,19 -28.5,18.995 v3(-28.35,9.318)
pads on no net: D1.5 D1.8 D1.28 D2.5 D2.8 D2.28 D3.5 D3.8 D3.28 D4.2 D4.3 D4.4 D4.6 D4.8 D4.9 D4.11 D4.12 D4.13 D4.15 D4.17 D4.19 D4.21 D4.23 D4.28 D4.29 D4.30 D5.2 D5.4 D5.6 D5.8 D5.9 D5.11 D5.12 D5.13 D5.15 D5.17 D5.19 D5.21 D5.23 D5.28 D5.29 D5.30 D6.2 D6.3 D6.4 D6.6 D6.8 D6.9 D6.11 D6.12 D6.13 D6.15 D6.17 D6.19 D6.21 D6.23 D6.28 D6.29 D6.30
copper on no net:
  other v3: -15.75,5.75 -7.25,5.75 -15.75,6.75 -7.25,6.75 -15.75,7.75 -7.25,7.75 -15.75,8.75 -7.25,8.75 -15.75,9.75 -7.25,9.75 -17.75,70.25 -7.25,70.25 -17.75,71.25 -7.25,71.25 -17.75,72.25 -7.25,72.25 -17.75,73.25 -7.25,73.25 -17.75,74.25 -7.25,74.25 -17.75,75.25 -7.25,75.25 -17.75,76.25 -7.25,76.25

## Polygon pours and split planes (outlines as drawn)
1_GND on Top Layer "RF_GND" (solid, remove dead copper, pour order 0): -45,75.5 -45,50.5 -20,50.5 -20,75.5
3_GND on Top Layer "RF_GND" (solid, remove dead copper, pour order 4): -43.25,15.75 -43.25,-9.25 -18.25,-9.25 -18.25,15.75
2_GND on Top Layer "Top Layer-No Net" (solid, remove dead copper, pour order 2): 45,75 45,-5 -5,-5 -5,75
3_GND on Bottom Layer "Top Layer-No Net" (solid, pour order 8): -43.25,-9.25 -18.25,-9.25 -18.25,15.75 -43.25,15.75
2_GND on Bottom Layer "Top Layer-No Net" (solid, pour order 6): -5,-5 45,-5 45,75 -5,75

## Keep-outs
Keep-Out Layer:
  the board outline again, w0.1

## Silkscreen, mask and mechanical layers (free items; w line width, h text height)
Top Overlay:
  text "- +" at -33.35,74.45 h1
  text "TX RX" at -40.55,74.35 h1
  text "R" at -27.25,74.15 h1
  text "R" at 18.6,53.075 h1
  text "RX TX" at 10.5,53 h1
  text "PPS" at -37,44.5 h1
  text "DR" at -31,44.5 h1
  text "- +" at 37.5,41 h1 r270
  text "PPS" at 1,38.5 h1
  text "DR" at 38.25,33.5 h1
  text "RXTX - + R DR" at -38.45,15.95 h1
  text "PPS" at -41.75,5.5 h1 r270
Mechanical 15:
  lines w0.1: -45,50.5 -20,75.5 ; -45,75.5 -20,50.5 ; -43.25,-9.25 -18.25,15.75 ; -43.25,15.75 -18.25,-9.25 ; -5,-5 45,75 ; -5,75 45,-5